# Altium PCB Display Segmental LCD118x1 DF700543-05 Backlights RGBW.PcbDoc
Units mm, origin at the board's own origin, x right, y up, seen from the top; angles counter-clockwise.
Board outline 57 x 44 mm, 2 copper layers (Top Layer, Bottom Layer); 17 components, 21 nets, 51 pads, 19 vias.
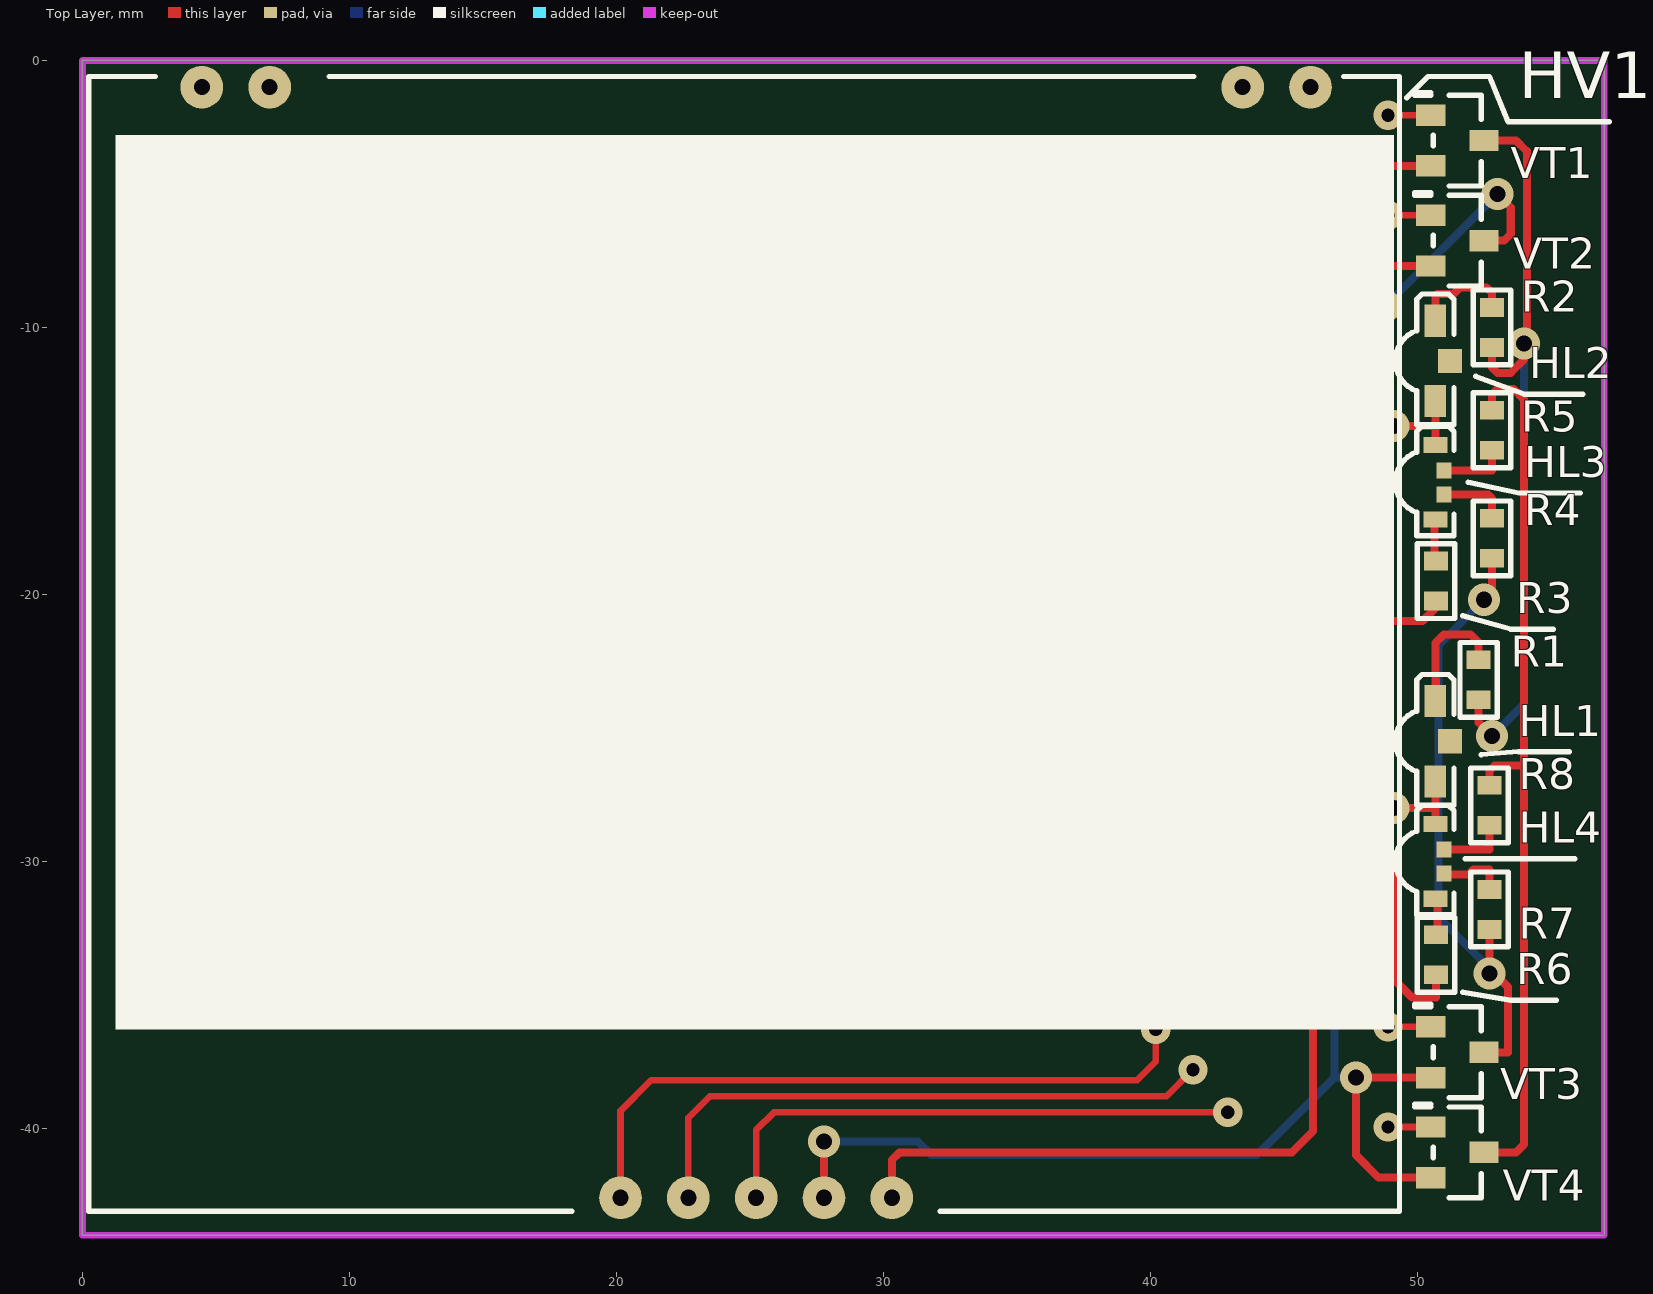
[diagram p0: Top Layer view]
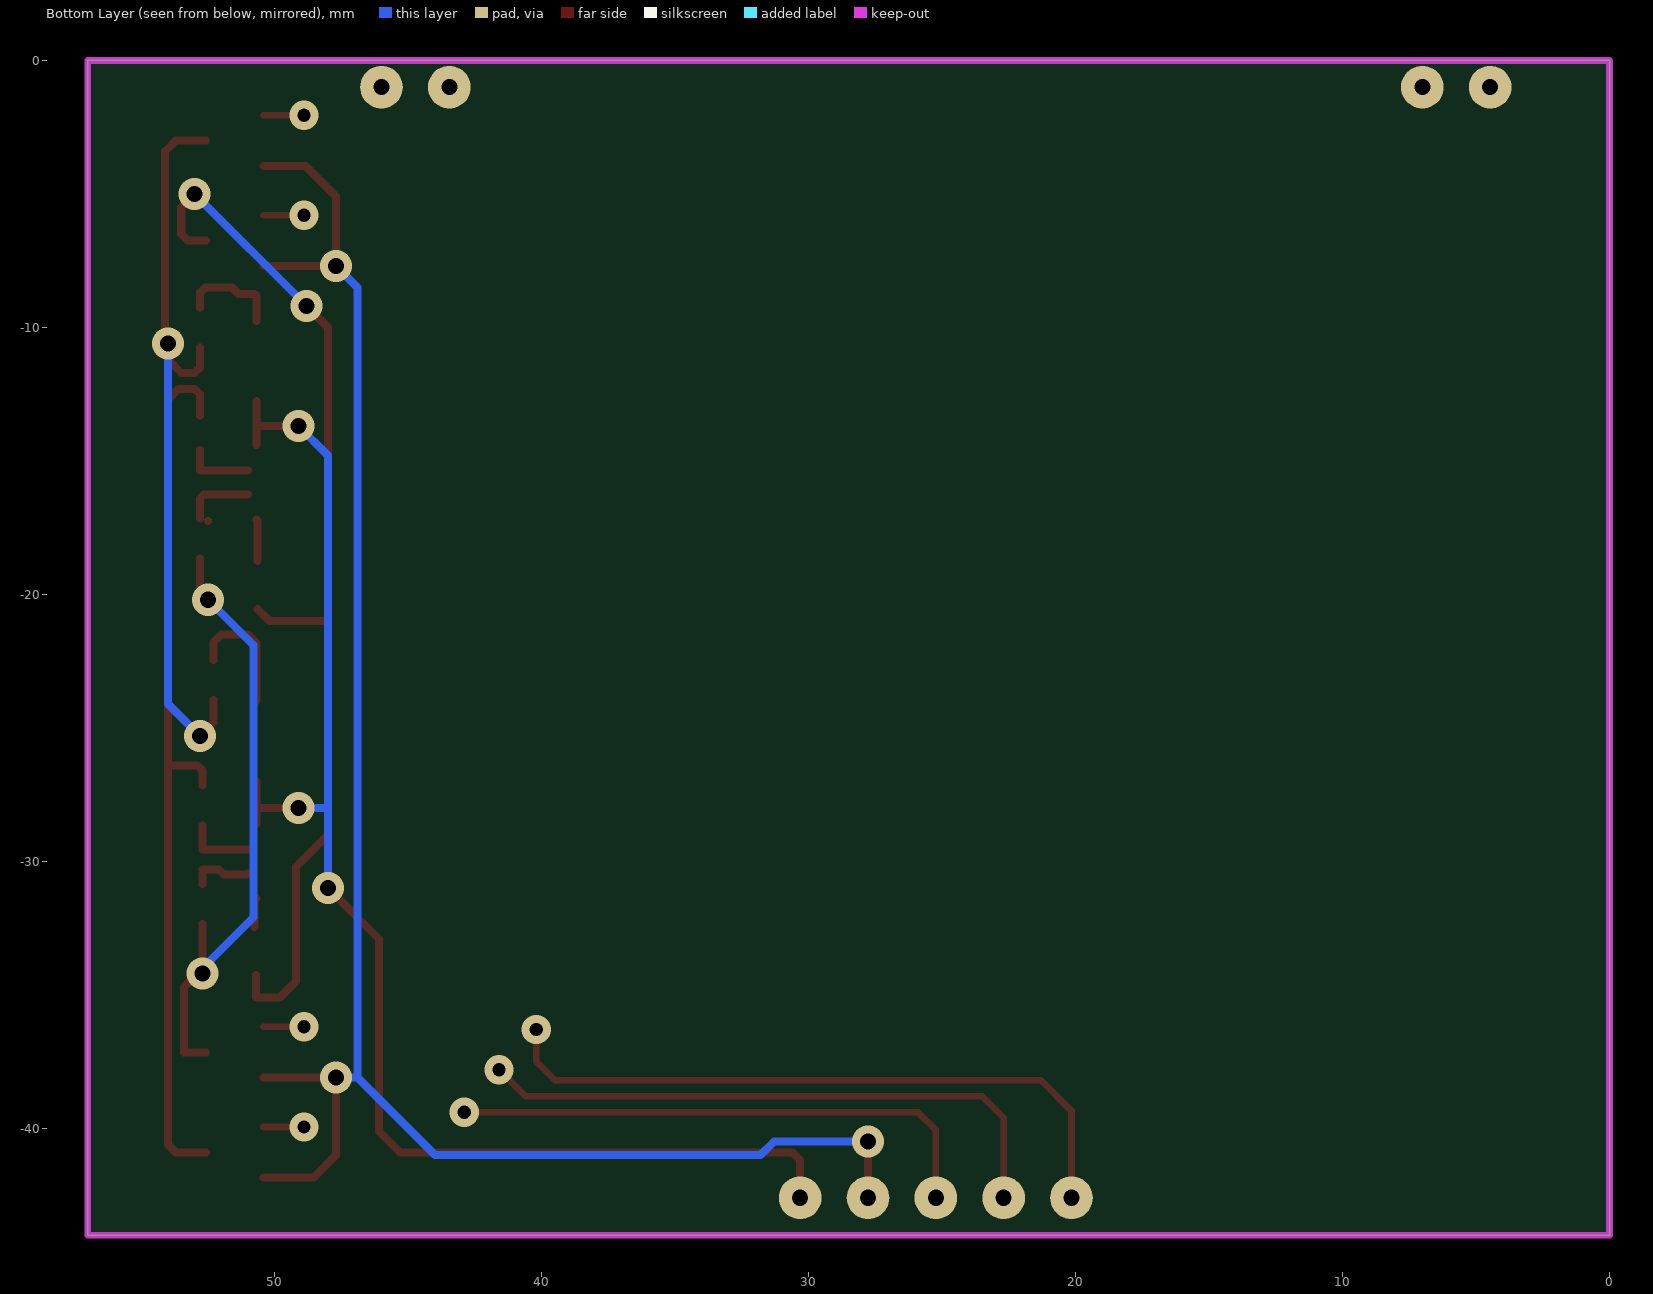
[diagram p1: Bottom Layer view, seen from below]
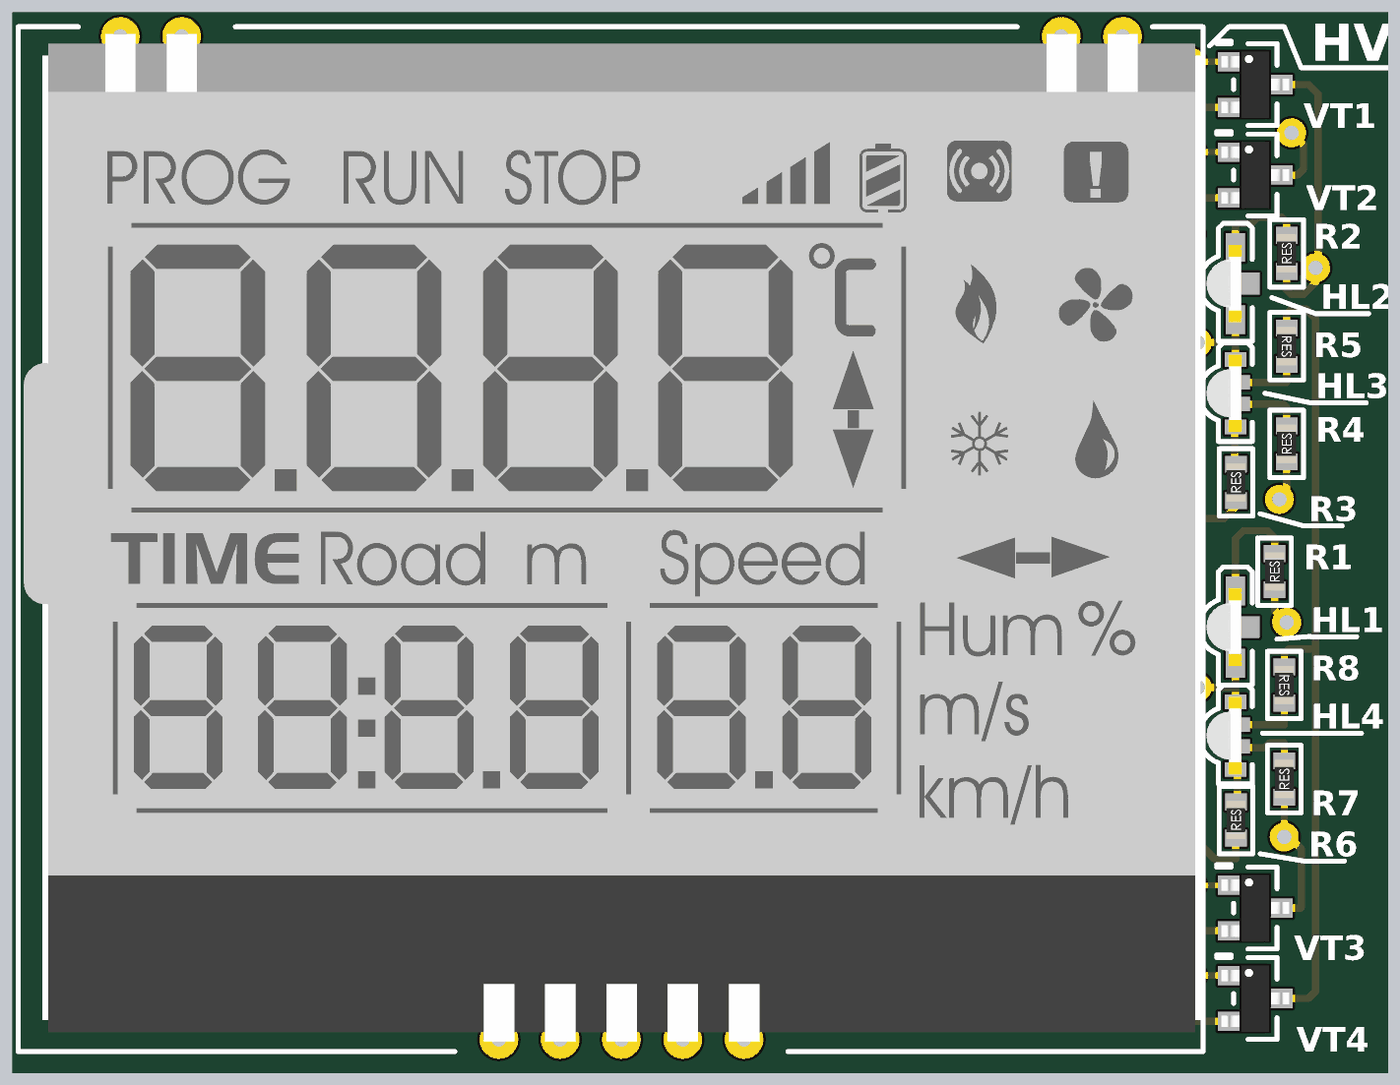
[diagram p2: 3D render of the assembled board from above, using the file's embedded part models]

## Layer stack, top to bottom
Top Solder: solder mask 0.0102, Solder Resist, Dk 3.5
Top Layer: signal copper 0.0356
Dielectric 1: dielectric 0.32, FR-4, Dk 4.8
Bottom Layer: signal copper 0.0356
Bottom Solder: solder mask 0.0102, Solder Resist, Dk 3.5

## Board outline
0,-44 57,-44 57,0 0,0

## Design rules (kind name [scope] priority, off if disabled: settings)
Clearance "Schematic Clearance Constraint_2" [InNetClass('Power 0.25A')] p1: gap=0.3 ignorepadtopadclearanceinfootprint=FALSE
Clearance "Schematic Clearance Constraint" [InNetClass('Signals 100kHz')] p2: gap=0.2 ignorepadtopadclearanceinfootprint=FALSE
Clearance [All] p3: gap=0.152 ignorepadtopadclearanceinfootprint=FALSE
ComponentClearance [All] p1: gap=0.05 collisioncheckmode=3 verticalgap=0.05 showdistances=FALSE
PolygonConnect [All] p1: connectstyle=Relief reliefconductorwidth=0.254 reliefentries=4 polygonreliefangle="90 Angle" airgapwidth=0.254
RoomDefinition "144 Display LCD seg DF700543-05" [InComponentClass('144 Display LCD seg DF700543-05')] p1: confinementstyle=ConfineIn formatcopy=TRUE lockcomponents=FALSE outline 0,-44 57,-44 57,0 0,0
RoutingVias "Schematic Routing Via Style_1" [InNetClass('Power 0.25A')] p1: holewidth=0.6 width=1.1 viastyle="Through Hole" minholewidth=0.5 minwidth=1.2 maxholewidth=0.8 maxwidth=1.8
RoutingVias "Schematic Routing Via Style" [InNetClass('Signals 100kHz')] p2: holewidth=0.5 width=1.1 viastyle="Through Hole" minholewidth=0.4 minwidth=0.9 maxholewidth=0.8 maxwidth=1.6
RoutingVias [All] p3: holewidth=0.5 width=1 viastyle="Through Hole" minholewidth=0.2 minwidth=0.5 maxholewidth=1 maxwidth=2
SolderMaskExpansion [All] p1: expansion=0.102
Width "Schematic Width Constraint_2" [InNetClass('Power 0.25A')] p1: maxlimit=0.5 minlimit=0.2 preferedwidth=0.3 minimp=50.000000 maximp=50.000000 favimp=50.000000
Width "Schematic Width Constraint_1" [InNetClass('Signals 100kHz')] p2: maxlimit=0.5 minlimit=0.1 preferedwidth=0.25 minimp=50.000000 maximp=50.000000 favimp=50.000000
Width Width_2 [InNet('3V3')] p3: maxlimit=1 minlimit=0.15 preferedwidth=0.3 minimp=50.000000 maximp=50.000000 favimp=50.000000
Width Width_6 [InNet('GND')] p4: maxlimit=1 minlimit=0.15 preferedwidth=0.3 minimp=50.000000 maximp=50.000000 favimp=50.000000
Width Width_1 [InNet('CSR_PWR')] p5: maxlimit=1 minlimit=0.15 preferedwidth=0.3 minimp=50.000000 maximp=50.000000 favimp=50.000000
Width Width_3 [InNet('VDD_PADS')] p6: maxlimit=1 minlimit=0.15 preferedwidth=0.3 minimp=50.000000 maximp=50.000000 favimp=50.000000
Width [InNetClass('All Nets')] p7: maxlimit=1 minlimit=0.152 preferedwidth=0.152 minimp=50.000000 maximp=50.000000 favimp=50.000000
29 further rules are at their usual default settings.

## Classes and differential pairs
net class "Signals 100kHz": BLUE DCLK DIN GREEN LOAD RED WHITE
net class "Power 0.25A": GND NetHL1_2 NetHL2_2 NetHL3_1 NetHL3_2 NetHL3_4 NetHL4_1 NetHL4_2 NetHL4_4 NetR1_1 NetR3_1 NetR4_1 NetR5_1 VCC

## Components (designator, comment, footprint, x,y, rotation, side; value= is the part's Value field where it differs from the comment)
HL1 "White, Cool" "LED 3216 RA" 50.475,-25.5 r270 top
HL2 "White, Cool" "LED 3216 RA" 50.475,-11.25 r270 top
HL3 "RGB" "LED RGB 3216 RA" 50.375,-15.8 r270 top
HL4 "RGB" "LED RGB 3216 RA" 50.375,-30 r270 top
HV1 "DF700543-05" "DISP SEG LCD128 DF700543-05" 25.235,-21.8 r0 top
R1 "120" RESC1608M 52.3,-23.2 r90 top
R2 "120" RESC1608M 52.8,-10 r90 top
R3 "180" RESC1608M 50.7,-19.5 r90 top
R4 "120" RESC1608M 52.8,-17.9 r90 top
R5 "120" RESC1608M 52.8,-13.85 r270 top
R6 "180" RESC1608M 50.7,-33.5 r90 top
R7 "120" RESC1608M 52.7,-31.8 r90 top
R8 "120" RESC1608M 52.7,-27.9 r270 top
VT1 "2V7002LT3G" SOT-23-3M 51.5,-3 r270 top
VT2 "2V7002LT3G" SOT-23-3M 51.5,-6.75 r270 top
VT3 "2V7002LT3G" SOT-23-3M 51.5,-37.15 r270 top
VT4 "2V7002LT3G" SOT-23-3M 51.5,-40.9 r270 top

## Footprints (in the part's own frame and the unit in brackets; to place one, negate y for a bottom-side part, rotate by r counter-clockwise, add the part's x,y. Pads: shape width x height; smd on the part's side, far side on the other; paste and mask are expansions set on the pad)
"DISP SEG LCD128 DF700543-05" [mm]
  round 1.6 hole 0.6: 0(-20.765,20.8) 0(-18.225,20.8) 0(18.225,20.8) 0(20.765,20.8) 1(5.08,-20.8) 2(2.54,-20.8) 3(0,-20.8) 4(-2.54,-20.8) 5(-5.08,-20.8)
  silkscreen extent -25,-21.3 24.1,21.2, body extent -24.77,-20.9 24.01,20.9, height 5.61
"LED 3216 RA" [mm] "LED Indication, Body 3.2x1.6mm, Right Angle"
  rect 0.9x0.9 smd: 0(0,0.75)
  rect 1.2x0.8 smd: 1(1.5,0.2) 2(-1.5,0.2)
  silkscreen extent -2.5,-1.3 2.4,0.9, body extent -1.61,-1 1.61,0.45, height 1.01
"LED RGB 3216 RA" [mm] "LED RGB Indication, Body 3.2x1.6mm, Right Angle"
  rect 0.6x0.55 smd: 1(-0.45,0.625) 2(0.45,0.625)
  rect 0.6x0.9 smd: 3(-1.4,0.3) 4(1.4,0.3)
  silkscreen extent -2.1,-1.2 2,1, body extent -1.61,-0.9 1.61,0.55, height 1.01
RESC1608M [mm] "Chip Resistor, Body 1.6x0.8mm, IPC High Density"
  rect 0.7x0.9 smd: 1(-0.75,0) 2(0.75,0)
  silkscreen extent -1.4,-0.7 1.4,0.7, body extent -0.8,-0.4 0.8,0.4, height 0.35
SOT-23-3M [mm]
  rect 0.8x1.1 smd: 1(-0.95,-1) 2(0.95,-1) 3(0,1)
  silkscreen extent -1.8,-1.6 1.7,0.9, body extent -1.45,-1.4 1.45,1.4, height 1.3

## Part data
HL1 HL2: library part HQ12-2152UWC, "LED White 1206(3216) RA", Forward Current=20mA, Forward Voltage=3.1V, Manufacturer=Harvatek, Operating Temperature="-40°C +85°C", Package="1206 (3216) RA", Color="White, Cool", Dimension="3.20mm x 1.50mm", Group="Discrete - LED", Mounting Type="Surface Mount, Right Angle", Part name=HQ12-2152UWC, Thickness=1.00mm
HL3 HL4: library part HQ12-2353RGBC, "LED RGB 1206(3216) RA CA", Forward Current=25mA, Forward Voltage="R 2.1V, G 2.7V, B 2.9V", Manufacturer=Harvatek, Operating Temperature="-30°C +85°C", Package="1206 (3216) RA", Color=RGB, Dimension="3.20mm x 1.40mm", Group="Discrete - LED", Mounting Type="Surface Mount, Right Angle", Part name=HQ12-2353RGBC, Thickness=1.00mm, Wavelength="R 625nm, G 528nm, B 470nm"
HV1: "Display Segmental LCD128 Special", Color=Black, Forward Current=50mA, Operating Temperature="-40°C +85°C", Dimension="48.53mm x 41.00mm", Driver=ML1001, Group="Digital - Displays -  Segmental", Mounting Type="Through Hole", Package=DF700543-05, Part name=DF700543-05, Thickness=6.00mm
R1 R2 R4 R5 R7 R8: library part RC0603JR-07120RL, "RESC 120 0603(1608)", Manufacturer=Yageo, Operating Temperature="-55°C +155°C", Package="0603 (1608)", Power=0.1W, Temperature Coefficient=±100ppm/°C, Tolerance=±5%, Dimension="1.60mm x 0.80mm", Group="Discrete - Resistors - Ceramic", Mounting Type="Surface Mount", Part name=RC0603JR-07120RL, Thickness=0.55mm, Type="Thin Film"
R3 R6: library part RC0603JR-07180RL, "RESC 180 0603(1608)", Manufacturer=Yageo, Operating Temperature="-55°C +155°C", Package="0603 (1608)", Power=0.1W, Temperature Coefficient=±100ppm/°C, Tolerance=±5%, Dimension="1.60mm x 0.80mm", Group="Discrete - Resistors - Ceramic", Mounting Type="Surface Mount", Part name=RC0603JR-07180RL, Thickness=0.55mm, Type="Thin Film"
VT1 VT2 VT3 VT4: "MOSFET N 0.1A 60V", Drain-Source ON-Resistance="7.5 Ohm", Drain-Source Voltage=60V, Drain Current=115mA, Gate-Source Voltage=±20V, Manufacturer="ON Semiconductor", Operating Temperature="-55°C +150°C", Package=SOT-23, Power Dissipation=225mW, Dimension="2.90mm x 2.80mm", FET Type=N-Channel, Group="Discrete - Transistors - FET", Mounting Type="Surface Mount", Part name=2V7002LT3G, Thickness=1.00mm

## Via types
v1: diameter 1.2, hole 0.6, Top Layer to Bottom Layer, 12 vias
v2: diameter 1.1, hole 0.5, Top Layer to Bottom Layer, 7 vias

## Nets (pads, with @x,y where several pads share a name; then routed paths per layer and width w, separated by ;. In a path a pad name is that pad's centre, name@x,y a point inside that pad or via, vN(x,y) a via of type N, cw(c..) or ccw(c..) an arc to the next point about the centre after c; other vN are vias at no path point)
BLUE: VT4.1 | length 1.5
  Top Layer w0.25: v2(48.9,-39.95) VT4.1@50.425,-39.95
DCLK: HV1.5 | length 25.3
  Top Layer w0.25: HV1.5 20.155,-39.345 21.3,-38.2 39.5,-38.2 40.2,-37.5 v2(40.2,-36.3)
DIN: HV1.4 | length 22.6
  Top Layer w0.25: HV1.4 22.695,-39.605 23.5,-38.8 40.6,-38.8 v2(41.6,-37.8)
GND: HV1.2 VT1.2 VT2.2 VT3.2 VT4.2 | length 71.4
  Top Layer w0.3: HV1.2 v1(27.775,-40.5) ; VT4.2@50.425,-41.85 48.55,-41.85 47.7,-41 v1(47.7,-38.1) VT3.2@50.425,-38.1 ; VT2.2@50.425,-7.7 v1(47.7,-7.7) 47.7,-5.1 48.85,-3.95 VT1.2@50.425,-3.95
  Bottom Layer w0.3: v1(27.775,-40.5) 31.3,-40.5 31.8,-41 44,-41 46.9,-38.1 ; v1(47.7,-38.1) 46.9,-38.1 ; v1(47.7,-7.7) 46.9,-8.5 46.9,-38.1
GREEN: VT3.1 | length 1.5
  Top Layer w0.25: v2(48.9,-36.2) VT3.1@50.425,-36.2
LOAD: HV1.3 | length 20.5
  Top Layer w0.25: HV1.3 25.235,-40.065 25.9,-39.4 v2(42.9,-39.4)
NetHL1_2: HL1.2 R1.2 | length 5.5
  Top Layer w0.3: 50.7,-23.2 50.7,-23.975 HL1.2 50.675,-21.825 51,-21.5 52,-21.5 52.3,-21.8 R1.2
NetHL2_2: HL2.2 R2.2 | length 3.8
  Top Layer w0.3: HL2.2 50.675,-8.825 50.75,-8.75 51.35,-8.75 51.6,-8.5 52.6,-8.5 52.8,-8.7 R2.2
NetHL3_1: HL3.1 R5.2 | length 2.5
  Top Layer w0.3: HL3.1 52.8,-15.35 R5.2
NetHL3_2: HL3.2 R4.2 | length 2.6
  Top Layer w0.3: HL3.2 52.65,-16.25 52.8,-16.4 R4.2
NetHL3_4: HL3.4 R3.2 | length 1.6
  Top Layer w0.3: R3.2@50.65,-18.75 50.65,-17.225 HL3.4
NetHL4_1: HL4.1 R8.2 | length 2.6
  Top Layer w0.3: HL4.1 52.7,-29.55 R8.2
NetHL4_2: HL4.2 R7.2 | length 2.4
  Top Layer w0.3: HL4.2 51.05,-30.5 51.9,-30.5 52.1,-30.3 52.7,-30.3 R7.2@52.7,-30.85
NetHL4_4: HL4.4 R6.2 | length 1.1
  Top Layer w0.3: HL4.4 50.75,-31.475 R6.2@50.75,-32.45
NetR1_1: R1.1 R2.1 VT1.3 | length 28.5
  Top Layer w0.3: R1.1 52.3,-24.8 v1(52.8,-25.3) ; VT1.3@52.575,-3 53.7,-3 54.1,-3.4 54.1,-10.5 v1(54,-10.6) 54,-11.2 53.5,-11.7 53,-11.7 52.8,-11.5 R2.1
  Bottom Layer w0.3: v1(52.8,-25.3) 54,-24.1 v1(54,-10.6)
NetR3_1: R3.1 R6.1 VT2.3 | length 40.2
  Top Layer w0.3: v1(48.8,-9.2) 48,-10 48,-21 ; R3.1@50.65,-20.55 50.2,-21 48,-21 ; R6.1 50.7,-35.1 49.8,-35.1 49.2,-34.5 49.2,-30.2 48,-29 48,-21 ; VT2.3@52.575,-6.75 53.25,-6.75 53.5,-6.5 53.5,-5.5 v1(53,-5)
  Bottom Layer w0.3: v1(48.8,-9.2) v1(53,-5)
NetR4_1: R4.1 R7.1 VT3.3 | length 23.2
  Top Layer w0.3: v1(52.5,-20.2) 52.8,-19.9 R4.1 ; VT3.3@52.575,-37.15 53.4,-37.15 53.4,-34.7 52.9,-34.2 v1(52.7,-34.2) R7.1@52.7,-32.35
  Bottom Layer w0.3: v1(52.5,-20.2) 50.8,-21.9 50.8,-32.1 52.7,-34 v1(52.7,-34.2)
NetR5_1: R5.1 R8.1 VT4.3 | length 33.6
  Top Layer w0.3: VT4.3@52.575,-40.9 53.7,-40.9 54,-40.6 54,-26.4 ; R8.1 52.7,-26.6 52.9,-26.4 54,-26.4 ; R5.1@52.8,-13.3 52.8,-12.5 53,-12.3 53.6,-12.3 54,-12.7 54,-26.4
RED: VT2.1 | length 1.5
  Top Layer w0.25: v2(48.9,-5.8) VT2.1@50.425,-5.8
VCC: HL1.1 HL2.1 HL3.3 HL4.3 HV1.1 | length 52.8
  Top Layer w0.3: HV1.1 30.315,-41.185 30.6,-40.9 45.3,-40.9 46.1,-40.1 46.1,-32.9 v1(48,-31) ; v1(49.1,-28) 50.675,-28 ; v1(49.1,-13.7) 50.675,-13.7 ; HL4.3 50.675,-28 ; HL1.1 50.675,-28 ; HL3.3 50.675,-13.7 ; HL2.1 50.675,-13.7
  Bottom Layer w0.3: v1(48,-31) 48,-28 ; v1(49.1,-28) 48,-28 ; v1(49.1,-13.7) 48,-14.8 48,-28
WHITE: VT1.1 | length 1.5
  Top Layer w0.25: v2(48.9,-2.05) VT1.1@50.425,-2.05
pads on no net: HL1.0 HL2.0 HV1.0

## Keep-outs
Keep-Out Layer:
  the board outline again, w0.25

## Silkscreen, mask and mechanical layers (free items; w line width, h text height)
Top Overlay:
  lines w0.2: 49.6,-1.4 50.4,-0.6 52.7,-0.6 53.4,-2.3 57.2,-2.3 ; 51.7,-34.9 53.5,-35.2 55.2,-35.2 ; 51.7,-20.8 53.5,-21.3 55.1,-21.3 ; 51.8,-29.9 55.9,-29.9 ; 51.9,-15.8 53.8,-16.2 56.1,-16.2 ; 52.188,-11.832 54,-12.5 56.2,-12.5 ; 52.4,-26 53.79,-25.884 ; 53.8,-25.9 55.7,-25.9

## Text inside footprints (layer, text, board x,y; h text height)
HV1: Mechanical 13 "km/h" at 36.635,-33 h1.52; Mechanical 13 "m/s" at 36.535,-30.5 h1.52; Mechanical 13 "Hum %" at 36.635,-27.6 h1.52; Mechanical 13 "SPEED" at 26.635,-24.6 h1.52; Mechanical 13 "TIME" at 6.135,-24.7 h1.52; Mechanical 13 "STOP" at 21.435,-9.9 h1.52; Mechanical 13 "RUN" at 14.335,-9.9 h1.52; Mechanical 13 "PROG" at 6.035,-9.9 h1.52